# Altium PCB ICAN-7006-STM.PcbDoc (part 2 of 2)
Units mm, origin at the board's own origin, x right, y up, seen from the top; angles counter-clockwise.
Board outline 150 x 80 mm, 3 copper layers (Top Layer, DC3.3V, Bottom Layer); 45 components, 160 nets, 710 pads, 0 vias.
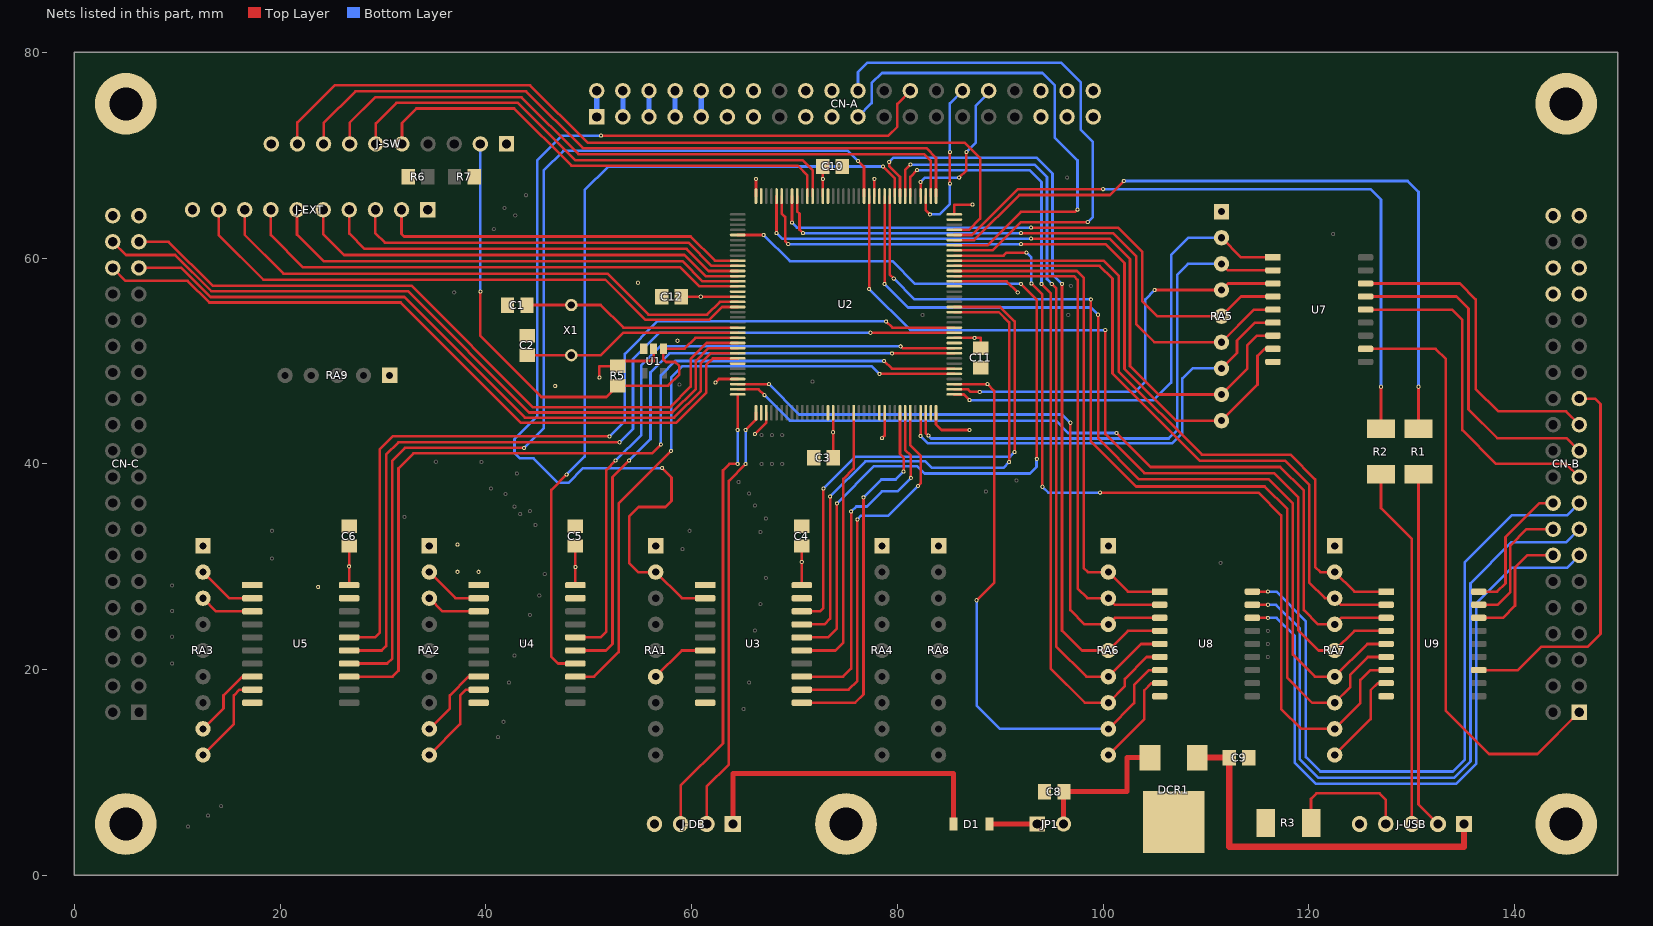
[diagram p3: the nets of this part, all layers, seen from the top]

## Nets (pads, with @x,y where several pads share a name; then routed paths per layer and width w, separated by ;. In a path a pad name is that pad's centre, name@x,y a point inside that pad or via, vN(x,y) a via of type N, cw(c..) or ccw(c..) an arc to the next point about the centre after c; other vN are vias at no path point) (continued)
DC3.3V: C3.2 C4.2 C5.2 C6.2 C10.2 C11.2 C12.2 CN-A.7 CN-A.8 D1.1 J-DB.1 J-EXT.1 J-SW.1 pad.0@26.7,30.048 pad.0@48.7,29.972 pad.0@51.029,48.387 pad.0@60.884,56.25 pad.0@62.3,47.9 pad.0@66.25,67.7 pad.0@66.142,42.901 pad.0@70.7,30.48 pad.0@72.75,67.7 pad.0@73.75,43.078 pad.0@77.75,67.7 pad.0@78.5,42.5 pad.0@87,43.3 pad.0@87.3,65.2 pad.0@87.5,52.25 pad.0@91.694,56.667 R5.2 RA1.1 RA2.1 RA3.1 RA4.1 RA5.1 RA6.1 RA7.1 RA8.1 RA9.1 U1.2 U2.17 U2.33 U2.39 U2.52 U2.62 U2.72 U2.84 U2.95 U2.108 U2.121 U2.131 U2.144 U3.20 U4.20 U5.20 | length 94.1
  Top Layer w0.254: U5.20@26.7,28.215 C6.2@26.7,32.025 ; U4.20@48.7,28.215 C5.2@48.7,32.025 ; pad.0@51.029,48.387 51.029,49.5 R5.2@52.8,49.5 53.3,50 56.3,50 U1.2@56.3,51.2 ; C12.2@59,56.25 U2.17@64.475,56.25 ; pad.0@62.3,47.9 62.65,48.25 U2.33@64.475,48.25 ; pad.0@66.142,42.901 67.25,44.009 U2.39@67.25,44.975 ; U2.144@66.25,66.025 pad.0@66.25,67.7 ; U3.20@70.7,28.215 C4.2@70.7,32.025 ; U2.131@72.75,66.025 C10.2@72.75,68.909 ; C3.2@73.75,40.6 U2.52@73.75,44.975 ; U2.121@77.75,66.025 pad.0@77.75,67.7 ; pad.0@78.5,42.5 78.75,42.75 U2.62@78.75,44.975 ; U2.72@83.75,44.975 83.75,43.85 84.3,43.3 pad.0@87,43.3 ; U2.84@85.525,52.25 88.1,52.25 C11.2@88.1,51.25 ; U2.95@85.525,57.75 90.611,57.75 pad.0@91.694,56.667 ; U2.108@85.525,64.25 85.525,65.2 pad.0@87.3,65.2
  Top Layer w0.5: J-DB.1@64,5 64,9.9 85.46,9.9 D1.1@85.46,5
  Bottom Layer w0.5: CN-A.7@58.39,73.73 CN-A.8@58.39,76.27
DC5V: CN-A.5 CN-A.6 | length 2.5
  Bottom Layer w0.5: CN-A.5@55.85,73.73 CN-A.6@55.85,76.27
DC12V: CN-A.3 CN-A.4 | length 2.5
  Bottom Layer w0.5: CN-A.3@53.31,73.73 CN-A.4@53.31,76.27
DC24V: CN-A.1 CN-A.2 | length 2.5
  Bottom Layer w0.5: CN-A.1@50.77,73.73 CN-A.2@50.77,76.27
EXT_0: J-EXT.2 U2.10 | length 36.1
  Top Layer w0.254: J-EXT.2@31.8,64.7 31.8,62.358 32.058,62.1 59.9,62.1 62.25,59.75 U2.10@64.475,59.75
EXT_1: J-EXT.3 U2.11 | length 38.8
  Top Layer w0.254: J-EXT.3@29.26,64.7 29.26,62.409 30.169,61.5 59.7,61.5 61.95,59.25 U2.11@64.475,59.25
EXT_2: J-EXT.4 U2.12 | length 41.6
  Top Layer w0.254: J-EXT.4@26.72,64.7 26.72,62.383 28.203,60.9 59.5,60.9 61.65,58.75 U2.12@64.475,58.75
EXT_3: J-EXT.5 U2.13 | length 44.4
  Top Layer w0.254: J-EXT.5@24.18,64.7 24.18,62.332 26.212,60.3 59.3,60.3 61.35,58.25 U2.13@64.475,58.25
EXT_4: J-EXT.6 U2.14 | length 47.1
  Top Layer w0.254: J-EXT.6@21.64,64.7 21.64,62.282 24.222,59.7 59.1,59.7 61.05,57.75 U2.14@64.475,57.75
EXT_5: J-EXT.7 U2.15 | length 49.9
  Top Layer w0.254: J-EXT.7@19.1,64.7 19.1,62.231 22.231,59.1 58.9,59.1 60.75,57.25 U2.15@64.475,57.25
EXT_6: J-EXT.8 U2.18 | length 54.1
  Top Layer w0.254: J-EXT.8@16.56,64.7 16.56,62.256 20.316,58.5 51.8,58.5 55.8,54.5 61.5,54.5 62.75,55.75 U2.18@64.475,55.75
EXT_7: J-EXT.9 U2.19 | length 56.8
  Top Layer w0.254: J-EXT.9@14.02,64.7 14.02,62.256 18.376,57.9 51.6,57.9 55.5,54 61.7,54 62.95,55.25 U2.19@64.475,55.25
GND: C1.2 C2.2 C3.1 C4.1 C5.1 C6.1 C8.1 C9.1 C10.1 C11.1 C12.1 CN-A.35 CN-A.36 CN-A.37 CN-A.38 CN-A.39 CN-A.40 CN-B.39 CN-B.40 CN-C.39 CN-C.40 DCR1.2 J-DB.4 J-EXT.10 J-SW.10 J-USB.5 pad.0@5,5 pad.0@5,75 pad.0@23.698,28.042 pad.0@37.236,29.515 pad.0@37.236,32.156 pad.0@39.294,29.515 pad.0@46.736,47.574 pad.0@54.771,57.608 pad.0@58.623,51.968 pad.0@75,5 pad.0@145,5 pad.0@145,75 R3.1 R6.2 R7.2 U1.3 U2.16 U2.30 U2.38 U2.51 U2.61 U2.71 U2.83 U2.94 U2.107 U2.120 U2.130 U2.143 U3.1 U3.10 U3.19 U4.1 U4.10 U4.19 U5.1 U5.10 U5.19 U7.9 U8.9 U9.9
I2C_SCL: CN-A.18
I2C_SCL2: CN-A.20
I2C_SDA: CN-A.17
I2C_SDA2: CN-A.19
JTCK: J-SW.8 U2.109 | length 69.2
  Top Layer w0.254: J-SW.8@24.22,71.1 24.22,73.12 27.308,76.208 43.892,76.208 49.416,70.684 82.816,70.684 83.75,69.75 U2.109@83.75,66.025
JTDI: J-SW.7 U2.110 | length 65.6
  Top Layer w0.254: J-SW.7@26.76,71.1 26.76,73.16 29.234,75.634 43.466,75.634 49,70.1 82.6,70.1 83.25,69.45 U2.110@83.25,66.025
JTDO: J-SW.6 U2.133 | length 50.5
  Top Layer w0.254: J-SW.6@29.3,71.1 29.3,73.1 31.3,75.1 43.1,75.1 48.7,69.5 70.8,69.5 71.75,68.55 U2.133@71.75,66.025
JTMS: J-SW.9 U2.105 | length 81.7
  Top Layer w0.254: J-SW.9@21.68,71.1 21.68,73.18 25.3,76.8 44.3,76.8 49.9,71.2 86.554,71.2 88.036,69.718 88.036,63.836 86.95,62.75 U2.105@85.525,62.75
JTRST: J-SW.5 U2.134 | length 46.7
  Top Layer w0.254: J-SW.5@31.84,71.1 31.84,73.14 33.246,74.546 42.754,74.546 48.31,68.99 70.31,68.99 71.25,68.05 U2.134@71.25,66.025
LIGHT-ON_CNT: pad.0@87.7,26.746 pad.0@88.75,47.75 RA6.8 U2.75 U8.7 | length 57.6
  Top Layer w0.254: U2.75@85.525,47.75 pad.0@88.75,47.75 89.4,47.1 89.4,28.446 pad.0@87.7,26.746 ; RA6.8@100.5,14.245 103,16.745 103,18.5 104.46,19.96 U8.7@105.5,19.96
  Bottom Layer w0.254: pad.0@87.7,26.746 87.7,16.516 89.971,14.245 RA6.8@100.5,14.245
LUG-BRAKE: CN-B.23 U7.16 | length 31.6
  Top Layer w0.254: U7.16@125.5,57.54 134.66,57.54 136.2,56 136.2,47.3 138.4,45.1 144.98,45.1 CN-B.23@146.27,43.81
LUG-BRAKE_CNT: pad.0@88,47 pad.0@105.005,56.905 RA5.4 U2.74 U7.3 | length 40.1
  Top Layer w0.254: U2.74@85.525,47.25 86.862,47.25 87.112,47 pad.0@88,47 ; pad.0@105.005,56.905 RA5.4@111.5,56.905 112.135,57.54 U7.3@116.5,57.54
  Bottom Layer w0.254: pad.0@88,47 103.1,47 104.1,48 104.1,56 pad.0@105.005,56.905
LUG-PWM1: CN-B.19 U7.14 | length 33.8
  Top Layer w0.254: U7.14@125.5,55 133.9,55 134.9,54 134.9,43.3 138.2,40 145,40 CN-B.19@146.27,38.73
LUG-PWM1_CNT: pad.0@70.819,62.431 pad.0@92,62.431 RA5.6 U2.136 U7.5 | length 59.1
  Top Layer w0.254: U2.136@70.25,66.025 70.25,64.552 70.485,64.317 70.485,62.765 pad.0@70.819,62.431 ; pad.0@92,62.431 100.969,62.431 103.2,60.2 103.2,53.6 104.975,51.825 RA5.6@111.5,51.825 114.675,55 U7.5@116.5,55
  Bottom Layer w0.254: pad.0@70.819,62.431 pad.0@92,62.431
LUG-PWM2: CN-B.21 U7.15 | length 32.7
  Top Layer w0.254: U7.15@125.5,56.27 134.33,56.27 135.5,55.1 135.5,45.3 138.3,42.5 145.04,42.5 CN-B.21@146.27,41.27
LUG-PWM2_CNT: pad.0@69.75,63.448 pad.0@93,62.964 RA5.5 U2.137 U7.4 | length 56.7
  Top Layer w0.254: pad.0@69.75,63.448 U2.137@69.75,66.025 ; pad.0@93,62.964 101.436,62.964 103.8,60.6 103.8,55.8 105.235,54.365 RA5.5@111.5,54.365 113.405,56.27 U7.4@116.5,56.27
  Bottom Layer w0.254: pad.0@69.75,63.448 70.234,62.964 pad.0@93,62.964
MF-DIR_CNT: pad.0@68.25,62.433 pad.0@93,61.897 RA5.8 U2.140 U7.7 | length 68.1
  Top Layer w0.254: pad.0@68.25,62.433 U2.140@68.25,66.025 ; pad.0@93,61.897 100.603,61.897 102.6,59.9 102.6,49.5 105.355,46.745 RA5.8@111.5,46.745 114,49.245 114,51.5 114.96,52.46 U7.7@116.5,52.46
  Bottom Layer w0.254: pad.0@68.25,62.433 68.786,61.897 pad.0@93,61.897
MF-ENB_CNT: pad.0@82.25,42.723 RA5.7 U2.69 U7.6 | length 45.5
  Top Layer w0.254: pad.0@82.25,42.723 U2.69@82.25,44.975 ; RA5.7@111.5,49.285 113,50.785 113,52 114.73,53.73 U7.6@116.5,53.73
  Bottom Layer w0.254: pad.0@82.25,42.723 82.973,42 106.7,42 107.7,43 107.7,48.3 108.685,49.285 RA5.7@111.5,49.285
MF-PWM: CN-B.1 U7.11 | length 58.8
  Top Layer w0.254: U7.11@125.5,51.19 132.31,51.19 133.3,50.2 133.3,16 137.5,11.8 142.2,11.8 CN-B.1@146.27,15.87
MF-PWM_CNT: pad.0@69.386,61.364 pad.0@92,61.364 RA5.9 U2.139 U7.8 | length 69.7
  Top Layer w0.254: U2.139@68.75,66.025 68.75,64.346 69.088,64.008 69.088,61.662 pad.0@69.386,61.364 ; pad.0@92,61.364 100.236,61.364 102.075,59.525 102.075,49.225 107.095,44.205 RA5.9@111.5,44.205 115,47.705 115,50.5 115.69,51.19 U7.8@116.5,51.19
  Bottom Layer w0.254: pad.0@69.386,61.364 pad.0@92,61.364
MIC-MOTOR: CN-B.25 U9.12 | length 37.9
  Top Layer w0.254: U9.12@136.5,19.96 140.305,19.96 142.57,22.225 147.091,22.225 148.336,23.47 148.336,45.822 147.808,46.35 CN-B.25@146.27,46.35
MIC-MOTOR_CNT: pad.0@92.532,60.528 pad.0@93.015,57.531 pad.0@94.079,37.779 pad.0@99.7,37.2 RA7.8 U2.100 U9.7 | length 88.4
  Top Layer w0.254: U2.100@85.525,60.25 90.324,60.25 90.602,60.528 pad.0@92.532,60.528 ; pad.0@93.015,57.531 94.079,56.467 pad.0@94.079,37.779 ; pad.0@99.7,37.2 115.1,37.2 117.3,35 117.3,16.2 119.255,14.245 RA7.8@122.5,14.245 125,16.745 125,19 125.96,19.96 U9.7@127.5,19.96
  Bottom Layer w0.254: pad.0@92.532,60.528 93.015,60.046 pad.0@93.015,57.531 ; pad.0@94.079,37.779 94.658,37.2 pad.0@99.7,37.2
ML-ALM: pad.0@43.713,41.554 pad.0@76.174,69.445 U2.123 U5.14 | length 100.1
  Top Layer w0.254: U5.14@26.7,20.595 30.395,20.595 30.9,21.1 30.9,40.323 32.131,41.554 pad.0@43.713,41.554 ; pad.0@76.174,69.445 76.75,68.868 U2.123@76.75,66.025
  Bottom Layer w0.254: pad.0@43.713,41.554 45.618,43.459 45.618,68.518 47.534,70.434 75.184,70.434 pad.0@76.174,69.445
ML-BRAKE_CNT: pad.0@78.75,57.5 pad.0@99.5,54.5 RA7.6 U2.119 U9.5 | length 90
  Top Layer w0.254: pad.0@78.75,57.5 U2.119@78.75,66.025 ; pad.0@99.5,54.5 99.5,42.5 103.5,38.5 116.1,38.5 118.425,36.175 118.425,21.475 120.575,19.325 RA7.6@122.5,19.325 125.675,22.5 U9.5@127.5,22.5
  Bottom Layer w0.254: pad.0@78.75,57.5 81.05,55.2 98.8,55.2 pad.0@99.5,54.5
ML-ENB_CNT: pad.0@77.25,57 pad.0@100.2,53 RA7.5 U2.122 U9.4 | length 88.1
  Top Layer w0.254: pad.0@77.25,57 U2.122@77.25,66.025 ; pad.0@100.2,53 100.2,42.9 104,39.1 116.6,39.1 118.975,36.725 118.975,23.825 120.935,21.865 RA7.5@122.5,21.865 124.405,23.77 U9.4@127.5,23.77
  Bottom Layer w0.254: pad.0@77.25,57 81.25,53 pad.0@100.2,53
ML-F/*R_CNT: pad.0@79.643,58 pad.0@98.8,56 RA7.7 U2.118 U9.6 | length 93.4
  Top Layer w0.254: U2.118@79.25,66.025 79.25,58.393 pad.0@79.643,58 ; pad.0@98.8,56 98.8,42.2 103.2,37.8 115.7,37.8 117.9,35.6 117.9,19.2 120.315,16.785 RA7.7@122.5,16.785 124,18.285 124,19.5 125.73,21.23 U9.6@127.5,21.23
  Bottom Layer w0.254: pad.0@79.643,58 81.643,56 pad.0@98.8,56
ML-PG: pad.0@57,41.885 pad.0@78.7,50 U2.78 U5.13 | length 87.3
  Top Layer w0.254: U5.13@26.7,19.325 30.925,19.325 31.5,19.9 31.5,39.577 32.941,41.018 56.134,41.018 pad.0@57,41.885 ; pad.0@78.7,50 79.45,49.25 U2.78@85.525,49.25
  Bottom Layer w0.254: pad.0@57,41.885 57,48.6 58.4,50 pad.0@78.7,50
ML-PWM: CN-B.14 U9.16 | length 11.9
  Top Layer w0.254: U9.16@136.5,25.04 138.84,25.04 140.028,26.228 140.028,29.928 141.21,31.11 CN-B.14@143.73,31.11
ML-PWM_CNT: pad.0@67.071,46.679 pad.0@101.3,43 RA7.4 U2.35 U9.3 | length 79.5
  Top Layer w0.254: U2.35@64.475,47.25 66.5,47.25 pad.0@67.071,46.679 ; pad.0@101.3,43 104.6,39.7 117.2,39.7 119.5,37.4 119.5,25.8 120.895,24.405 RA7.4@122.5,24.405 123.135,25.04 U9.3@127.5,25.04
  Bottom Layer w0.254: pad.0@67.071,46.679 69.55,44.2 95.4,44.2 96.6,43 pad.0@101.3,43
MLL-PG_B: pad.0@52,42.678 pad.0@78.902,53.848 U2.86 U5.16 | length 86.1
  Top Layer w0.254: U5.16@26.7,23.135 29.235,23.135 29.7,23.6 29.7,41.435 30.943,42.678 pad.0@52,42.678 ; pad.0@78.902,53.848 79.5,53.25 U2.86@85.525,53.25
  Bottom Layer w0.254: pad.0@52,42.678 53.5,44.178 53.5,50.7 56.648,53.848 pad.0@78.902,53.848
MLL-PG_F: pad.0@53,42.103 pad.0@77.368,52.75 U2.85 U5.15 | length 86.5
  Top Layer w0.254: U5.15@26.7,21.865 29.865,21.865 30.3,22.3 30.3,40.917 31.486,42.103 pad.0@53,42.103 ; pad.0@77.368,52.75 U2.85@85.525,52.75
  Bottom Layer w0.254: pad.0@53,42.103 54.3,43.403 54.3,50.2 56.85,52.75 pad.0@77.368,52.75
MLL-PWM1: CN-B.16 U9.17 | length 12.9
  Top Layer w0.254: U9.17@136.5,26.31 138.31,26.31 139.569,27.569 139.569,32.069 141.15,33.65 CN-B.16@143.73,33.65
MLL-PWM2: CN-B.18 U9.18 | length 13.4
  Top Layer w0.254: U9.18@136.5,27.58 138.28,27.58 139.1,28.4 139.1,32.9 142.39,36.19 CN-B.18@143.73,36.19
MLL-PWM2_CNT: RA7.2 U2.99 U9.1 | length 65.7
  Top Layer w0.254: U2.99@85.525,59.75 100.05,59.75 101.5,58.3 101.5,49 109.6,40.9 118.2,40.9 120.6,38.5 120.6,30 121.115,29.485 RA7.2@122.5,29.485 124.405,27.58 U9.1@127.5,27.58
MLL_PWM1_CNT: RA7.3 U2.98 U9.2 | length 66.6
  Top Layer w0.254: U2.98@85.525,59.25 99.65,59.25 100.9,58 100.9,48.8 109.4,40.3 117.7,40.3 120.009,37.991 120.009,28.491 121.555,26.945 RA7.3@122.5,26.945 123.135,26.31 U9.2@127.5,26.31
MLR-PG_B: pad.0@52.603,40.335 pad.0@80.318,51.432 U2.82 U4.16 | length 61.8
  Top Layer w0.254: U4.16@48.7,23.135 51.135,23.135 51.7,23.7 51.7,39.432 pad.0@52.603,40.335 ; pad.0@80.318,51.432 80.5,51.25 U2.82@85.525,51.25
  Bottom Layer w0.254: pad.0@52.603,40.335 55.1,42.832 55.1,49.6 56.932,51.432 pad.0@80.318,51.432
MLR-PG_F: pad.0@53.927,40.335 pad.0@79.477,50.75 U2.81 U4.15 | length 62.1
  Top Layer w0.254: U4.15@48.7,21.865 51.665,21.865 52.3,22.5 52.3,38.708 pad.0@53.927,40.335 ; pad.0@79.477,50.75 U2.81@85.525,50.75
  Bottom Layer w0.254: pad.0@53.927,40.335 56,42.408 56,48.9 57.85,50.75 pad.0@79.477,50.75
MLR-PWM1: CN-B.15 pad.0@116,26.31 U8.17 | length 66.3
  Top Layer w0.254: U8.17@114.5,26.31 pad.0@116,26.31
  Bottom Layer w0.254: pad.0@116,26.31 116.79,26.31 119.113,23.987 119.113,11.287 120.894,9.506 134.131,9.506 135.7,11.075 135.7,28.4 139.7,32.4 145.02,32.4 CN-B.15@146.27,33.65
MLR-PWM1_CNT: RA6.3 U2.96 U8.2 | length 50.8
  Top Layer w0.254: U2.96@85.525,58.25 97.15,58.25 97.512,57.887 97.512,27.888 98.455,26.945 RA6.3@100.5,26.945 101.135,26.31 U8.2@105.5,26.31
MLR-PWM2: CN-B.17 pad.0@116,27.58 U8.18 | length 68.8
  Top Layer w0.254: U8.18@114.5,27.58 pad.0@116,27.58
  Bottom Layer w0.254: pad.0@116,27.58 116.82,27.58 119.7,24.7 119.7,11.5 121.1,10.1 134,10.1 135.137,11.238 135.137,30.437 139.7,35 145.08,35 CN-B.17@146.27,36.19
MLR-PWM2_CNT: RA6.2 U2.97 U8.1 | length 49.4
  Top Layer w0.254: U2.97@85.525,58.75 97.45,58.75 98.1,58.1 98.1,29.9 98.515,29.485 RA6.2@100.5,29.485 102.405,27.58 U8.1@105.5,27.58
MOTOR-PWR1_CNT: pad.0@83.007,42.743 RA5.3 U2.70 U7.2 | length 52.1
  Top Layer w0.254: U2.70@82.75,44.975 82.75,43 pad.0@83.007,42.743 ; RA5.3@111.5,59.445 112.135,58.81 U7.2@116.5,58.81
  Bottom Layer w0.254: pad.0@83.007,42.743 83.284,42.466 106.366,42.466 107.2,43.3 107.2,58.4 108.245,59.445 RA5.3@111.5,59.445
MOTOR-PWR2_CNT: pad.0@87,46.2 RA5.2 U2.73 U7.1 | length 45.8
  Top Layer w0.254: U2.73@85.525,46.75 86.45,46.75 pad.0@87,46.2 ; RA5.2@111.5,61.985 113.405,60.08 U7.1@116.5,60.08
  Bottom Layer w0.254: pad.0@87,46.2 104.9,46.2 106.6,47.9 106.6,60.3 108.285,61.985 RA5.2@111.5,61.985
MR-ALM: pad.0@47.854,38.964 pad.0@78.591,68.909 U2.117 U4.14 | length 82.6
  Top Layer w0.254: pad.0@47.854,38.964 46.355,37.465 46.355,21.245 47.005,20.595 U4.14@48.7,20.595 ; pad.0@78.591,68.909 79.75,67.75 U2.117@79.75,66.025
  Bottom Layer w0.254: pad.0@47.854,38.964 49.6,40.71 49.6,66.6 51.909,68.909 pad.0@78.591,68.909
MR-BRAKE_CNT: pad.0@81.255,69.092 pad.0@95,57.5 RA6.6 U2.115 U8.5 | length 75.6
  Top Layer w0.254: U2.115@80.75,66.025 80.75,68.587 pad.0@81.255,69.092 ; pad.0@95,57.5 95.425,57.075 95.425,22.275 98.375,19.325 RA6.6@100.5,19.325 103.675,22.5 U8.5@105.5,22.5
  Bottom Layer w0.254: pad.0@81.255,69.092 93.308,69.092 94.536,67.864 94.536,57.964 pad.0@95,57.5
MR-ENB_CNT: pad.0@79.2,69.35 pad.0@96,57.5 RA6.5 U2.116 U8.4 | length 76.3
  Top Layer w0.254: pad.0@79.2,69.35 79.2,68.953 80.25,67.903 U2.116@80.25,66.025 ; pad.0@96,57.5 96,23.8 97.935,21.865 RA6.5@100.5,21.865 102.405,23.77 U8.4@105.5,23.77
  Bottom Layer w0.254: pad.0@79.2,69.35 79.621,69.771 93.529,69.771 95.07,68.23 95.07,58.43 pad.0@96,57.5
MR-F/*R_CNT: pad.0@81.902,68.552 pad.0@94,57.5 RA6.7 U2.114 U8.6 | length 77.3
  Top Layer w0.254: U2.114@81.25,66.025 81.25,67.9 pad.0@81.902,68.552 ; pad.0@94,57.5 94.9,56.6 94.9,20.1 98.215,16.785 RA6.7@100.5,16.785 102.107,18.393 102.107,19.107 104.23,21.23 U8.6@105.5,21.23
  Bottom Layer w0.254: pad.0@81.902,68.552 92.848,68.552 94,67.4 pad.0@94,57.5
MR-PG: pad.0@58,41.267 pad.0@78.25,48.75 U2.77 U4.13 | length 62.3
  Top Layer w0.254: U4.13@48.7,19.325 50.525,19.325 52.9,21.7 52.9,36.159 pad.0@58.008,41.267 ; pad.0@78.25,48.75 U2.77@85.525,48.75
  Bottom Layer w0.254: pad.0@58,41.267 58,48.4 59.1,49.5 77.5,49.5 pad.0@78.25,48.75
MR-PWM: CN-B.13 pad.0@116,25.04 U8.16 | length 64
  Top Layer w0.254: U8.16@114.5,25.04 pad.0@116,25.04
  Bottom Layer w0.254: pad.0@116,25.04 116.86,25.04 118.6,23.3 118.6,11 120.7,8.9 134.3,8.9 136.275,10.875 136.275,26.475 139.7,29.9 145.06,29.9 CN-B.13@146.27,31.11
MR-PWM_CNT: pad.0@67.5,47.75 pad.0@96.8,44 RA6.4 U2.34 U8.3 | length 61.6
  Top Layer w0.254: U2.34@64.475,47.75 pad.0@67.5,47.75 ; pad.0@96.8,44 96.8,25.8 98.195,24.405 RA6.4@100.5,24.405 101.135,25.04 U8.3@105.5,25.04
  Bottom Layer w0.254: pad.0@67.5,47.75 70.45,44.8 96,44.8 pad.0@96.8,44
NetC1_1: C1.1 U2.23 X1.2 | length 21.4
  Top Layer w0.254: C1.1@44,55.44 51.16,55.44 53.35,53.25 U2.23@64.475,53.25
NetC2_1: C2.1 U2.24 X1.1 | length 21.4
  Top Layer w0.254: C2.1@44,50.56 51.16,50.56 53.35,52.75 U2.24@64.475,52.75
NetC8_2: C8.2 DCR1.3 JP1.2 | length 14.8
  Top Layer w0.254: C8.2@96.14,8.104 C8.2@96.19,8.153
  Top Layer w0.5: JP1.2@96.14,5 C8.2@96.14,8.104 ; C8.2@96.19,8.153 102.328,8.153 102.328,11.45 DCR1.3@104.55,11.45
NetD1_2: D1.2 JP1.1 | length 4.7
  Top Layer w0.5: D1.2@88.94,5 JP1.1@93.6,5
NetJ-USB_2: J-USB.2 R1.2 | length 34.8
  Top Layer w0.254: R1.2@130.65,39 130.65,6.89 J-USB.2@132.54,5
NetJ-USB_3: J-USB.3 R2.2 | length 35.2
  Top Layer w0.254: R2.2@127,39 127,35.7 130,32.7 J-USB.3@130,5
NetJ-USB_4: J-USB.4 R3.2 | length 12.4
  Top Layer w0.254: R3.2@120.2,5.1 120.2,7.444 120.732,7.976 126.85,7.976 127.46,7.366 J-USB.4@127.46,5
NetRA1_6: RA1.6 U3.6 | length 5.9
  Top Layer w0.254: RA1.6@56.5,19.325 59.04,21.865 U3.6@61.3,21.865
NetRA2_2: RA2.2 U4.2 | length 5.9
  Top Layer w0.254: RA2.2@34.5,29.485 37.04,26.945 U4.2@39.3,26.945
NetRA2_3: RA2.3 U4.3 | length 5.3
  Top Layer w0.254: RA2.3@34.5,26.945 35.77,25.675 U4.3@39.3,25.675
NetRA2_8: RA2.8 U4.8 | length 7.6
  Top Layer w0.254: RA2.8@34.5,14.245 36.5,16.245 36.5,17.5 38.325,19.325 U4.8@39.3,19.325
NetRA2_9: RA2.9 U4.9 | length 9.1
  Top Layer w0.254: RA2.9@34.5,11.705 37.5,14.705 37.5,17.5 38.055,18.055 U4.9@39.3,18.055
NetRA3_2: RA3.2 U5.2 | length 5.9
  Top Layer w0.254: RA3.2@12.5,29.485 15.04,26.945 U5.2@17.3,26.945
NetRA3_3: RA3.3 U5.3 | length 5.3
  Top Layer w0.254: RA3.3@12.5,26.945 13.77,25.675 U5.3@17.3,25.675
NetRA3_8: RA3.8 U5.8 | length 7.6
  Top Layer w0.254: RA3.8@12.5,14.245 14.5,16.245 14.5,17.5 16.325,19.325 U5.8@17.3,19.325
NetRA3_9: RA3.9 U5.9 | length 9.1
  Top Layer w0.254: RA3.9@12.5,11.705 15.5,14.705 15.5,17.5 16.055,18.055 U5.9@17.3,18.055
NetRA6_9: RA6.9 U8.8 | length 9.5
  Top Layer w0.254: RA6.9@100.5,11.705 104,15.205 104,18 104.69,18.69 U8.8@105.5,18.69
NetRA7_9: RA7.9 U9.8 | length 9.5
  Top Layer w0.254: RA7.9@122.5,11.705 126,15.205 126,18 126.69,18.69 U9.8@127.5,18.69
PCM-CK: CN-B.35
PCM-DI: CN-B.34
PCM-DO: CN-B.33
PCM-SYNC: CN-B.36
RESET: J-SW.2 pad.0@39.46,56.74 R5.1 U1.1 U2.25 | length 52.7
  Top Layer w0.254: pad.0@39.46,56.74 39.46,52.44 45.392,46.508 51.708,46.508 R5.1@52.8,47.6 57.7,47.6 58.8,48.7 58.8,49.5 58.4,49.9 57.5,49.9 57.25,50.15 U1.1@57.25,51.2 59.3,51.2 60.35,52.25 U2.25@64.475,52.25
  Bottom Layer w0.254: pad.0@39.46,56.74 J-SW.2@39.46,71.1
SNS-BRAKE_CURR: CN-C.36 U2.29 | length 71.1
  Top Layer w0.254: CN-C.36@3.73,59.05 4.98,57.8 11.003,57.8 13.12,55.683 31.717,55.683 43.4,44 58.5,44 61.4,46.9 61.4,49.6 62.05,50.25 U2.29@64.475,50.25
SNS-COVER: pad.0@67,62.25 pad.0@74.117,36.17 pad.0@92,57.5 pad.0@93.546,40.484 U2.5 U3.16 | length 85.3
  Top Layer w0.254: U2.5@64.475,62.25 pad.0@67,62.25 ; U3.16@70.7,23.135 73.235,23.135 74.117,24.017 pad.0@74.117,36.17 ; pad.0@92,57.5 93.546,55.954 pad.0@93.546,40.484
  Bottom Layer w0.254: pad.0@67,62.25 69.55,59.7 79.5,59.7 81.7,57.5 pad.0@92,57.5 ; pad.0@74.117,36.17 77.73,39.782 81.918,39.782 82.635,39.065 92.862,39.065 93.515,39.718 pad.0@93.515,40.515
SNS-HOME_C: pad.0@75.5,35.368 pad.0@81.3,38.65 U2.66 U3.13 | length 34.1
  Top Layer w0.254: U3.13@70.7,19.325 74.725,19.325 75.5,20.1 pad.0@75.5,35.368 ; U2.66@80.75,44.975 80.75,41.348 81.3,40.798 pad.0@81.3,38.65
  Bottom Layer w0.254: pad.0@75.5,35.368 75.997,35.865 77.023,35.865 78.496,37.337 79.988,37.337 pad.0@81.3,38.65
SNS-HOME_L: pad.0@76.7,36.754 pad.0@80.6,39.25 U2.65 U3.11 | length 36.3
  Top Layer w0.254: U3.11@70.7,16.785 75.885,16.785 76.7,17.6 pad.0@76.7,36.754 ; U2.65@80.25,44.975 80.25,40.959 80.6,40.609 pad.0@80.6,39.25
  Bottom Layer w0.254: pad.0@76.7,36.754 78.427,38.481 79.831,38.481 pad.0@80.6,39.25
SNS-HOME_R: pad.0@76.1,34.596 pad.0@82,37.85 U2.67 U3.12 | length 36.4
  Top Layer w0.254: U3.12@70.7,18.055 75.255,18.055 76.1,18.9 pad.0@76.1,34.596 ; U2.67@81.25,44.975 81.25,41.813 82.271,40.792 82.271,38.121 pad.0@82,37.85
  Bottom Layer w0.254: pad.0@76.1,34.596 76.473,34.97 79.119,34.97 pad.0@82,37.85
SNS-LUG-CURR: CN-C.37 U2.26 | length 69
  Top Layer w0.254: CN-C.37@6.27,61.59 9.169,61.59 13.434,57.325 32.775,57.325 44.6,45.5 57.9,45.5 59.9,47.5 59.9,50.2 61.45,51.75 U2.26@64.475,51.75
SNS-MIC_CLOSE: U2.56 U3.15 | length 27.1
  Top Layer w0.254: U3.15@70.7,21.865 73.96,21.865 74.75,22.654 74.75,38.555 75.75,39.555 U2.56@75.75,44.975
SNS-MLL_CURR: CN-C.38 U2.27 | length 71.8
  Top Layer w0.254: CN-C.38@3.73,61.59 5.02,60.3 9.799,60.3 13.304,56.795 32.405,56.795 44.2,45 58.1,45 60.4,47.3 60.4,50 61.65,51.25 U2.27@64.475,51.25
SNS-MLR_CURR: CN-C.35 U2.28 | length 68.4
  Top Layer w0.254: CN-C.35@6.27,59.05 10.406,59.05 13.23,56.226 32.074,56.226 43.8,44.5 58.3,44.5 60.9,47.1 60.9,49.8 61.85,50.75 U2.28@64.475,50.75
SNS-RAIN: pad.0@73.457,36.83 pad.0@90.853,40.183 U2.89 U3.17 | length 53.5
  Top Layer w0.254: U3.17@70.7,24.405 72.905,24.405 73.457,24.957 pad.0@73.457,36.83 ; U2.89@85.525,54.75 89.847,54.75 90.853,53.744 pad.0@90.853,40.183
  Bottom Layer w0.254: pad.0@73.457,36.83 76.878,40.252 82.716,40.252 83.343,39.624 90.294,39.624 pad.0@90.853,40.183
SNS-US_EMG: pad.0@72.8,37.596 pad.0@91.387,41.145 U2.90 U3.18 | length 53
  Top Layer w0.254: U3.18@70.7,25.675 72.475,25.675 72.8,26 pad.0@72.8,37.596 ; U2.90@85.525,55.25 89.99,55.25 91.387,53.853 pad.0@91.387,41.145
  Bottom Layer w0.254: pad.0@72.8,37.596 75.918,40.714 90.955,40.714 pad.0@91.387,41.145
U5V: C9.2 DCR1.1 J-USB.1 | length 36.8
  Top Layer w0.6: DCR1.1@109.15,11.45 C9.2@112.25,11.45 112.25,2.794 135.08,2.794 J-USB.1@135.08,5
UART-CB_RX: CN-A.22 pad.0@98.5,63.5 U2.101 | length 53
  Top Layer w0.254: U2.101@85.525,60.75 89.25,60.75 92,63.5 pad.0@98.5,63.5
  Bottom Layer w0.254: CN-A.22@76.17,76.27 76.17,78.07 77.1,79 95.9,79 97.8,77.1 97.8,72.5 99,71.3 99,64 pad.0@98.5,63.5
UART-CB_TX: CN-A.21 pad.0@97.5,64.709 U2.102 | length 48.9
  Top Layer w0.254: U2.102@85.525,61.25 88.75,61.25 92,64.5 97.282,64.5 ; 97.282,64.491 pad.0@97.5,64.709
  Bottom Layer w0.254: CN-A.21@76.17,73.73 77.5,75.06 77.5,77 78.5,78 94.1,78 95.3,76.8 95.3,71.7 97.5,69.5 pad.0@97.5,64.709
UART-DB_RX: J-DB.3 pad.0@64.475,40 pad.0@64.475,43.3 U2.36 | length 44.5
  Top Layer w0.254: J-DB.3@58.92,5 58.92,8.72 63.043,12.843 63.043,39.37 63.673,40 pad.0@64.475,40 ; pad.0@64.475,43.3 U2.36@64.475,46.75
  Bottom Layer w0.254: pad.0@64.475,40 pad.0@64.475,43.3
UART-DB_TX: J-DB.2 pad.0@65.25,40 pad.0@65.25,43.3 U2.37 | length 42
  Top Layer w0.254: J-DB.2@61.46,5 61.46,8.66 63.607,10.807 63.607,38.357 pad.0@65.25,40 ; pad.0@65.25,43.3 66.25,44.3 U2.37@66.25,44.975
  Bottom Layer w0.254: pad.0@65.25,40 pad.0@65.25,43.3
US_EMG: CN-A.26 pad.0@51.181,71.907 pad.0@57.127,39.596 RA1.2 U3.2 | length 107.5
  Top Layer w0.254: pad.0@51.181,71.907 79.121,71.907 79.985,72.771 79.985,75.005 CN-A.26@81.25,76.27 ; pad.0@57.127,39.596 58.039,38.684 58.039,36.398 57.455,35.814 54.839,35.814 53.924,34.9 53.924,30.353 54.792,29.485 RA1.2@56.5,29.485 59.04,26.945 U3.2@61.3,26.945
  Bottom Layer w0.254: pad.0@51.181,71.907 47.396,71.907 44.983,69.494 44.983,44.618 42.774,42.408 42.774,41.072 43.31,40.536 44.63,40.536 47.015,38.151 48.006,38.151 49.451,39.596 pad.0@57.127,39.596
US_POWER: CN-A.32 pad.0@82.25,67.4 pad.0@86.004,67.818 pad.0@86.7,70.3 U2.112 | length 14.7
  Top Layer w0.254: U2.112@82.25,66.025 pad.0@82.25,67.4 ; pad.0@86.004,67.818 86.7,68.514 pad.0@86.7,70.3
  Bottom Layer w0.254: pad.0@82.25,67.4 82.668,67.818 pad.0@86.004,67.818 ; pad.0@86.7,70.3 87.6,71.2 87.6,74.8 CN-A.32@88.87,76.07
USB-DM: pad.0@102,67.5 pad.0@130.65,47.5 R1.1 U2.103 | length 71
  Top Layer w0.254: U2.103@85.525,61.75 87.45,61.75 91.842,66.142 100.642,66.142 pad.0@102,67.5 ; R1.1@130.65,43.4 pad.0@130.65,47.5
  Bottom Layer w0.254: pad.0@102,67.5 129.6,67.5 130.65,66.45 pad.0@130.65,47.5
USB-DP: pad.0@100,66.7 pad.0@127,47.5 R2.1 U2.104 | length 66
  Top Layer w0.254: U2.104@85.525,62.25 87.25,62.25 91.7,66.7 pad.0@100,66.7 ; R2.1@127,43.4 pad.0@127,47.5
  Bottom Layer w0.254: pad.0@100,66.7 126,66.7 127,65.7 pad.0@127,47.5
USB_5V: CN-A.9 CN-A.10 | length 2.5
  Bottom Layer w0.5: CN-A.9@60.93,73.73 CN-A.10@60.93,76.27
USB_DM1: CN-A.11
USB_DM2: CN-A.12
USB_DP1: CN-A.13
USB_DP2: CN-A.14
USB_POWER: CN-A.30 pad.0@83.16,64.262 pad.0@85.1,67.234 pad.0@85.1,70.3 U2.111 | length 15.8
  Top Layer w0.254: U2.111@82.75,66.025 82.75,64.672 pad.0@83.16,64.262 ; pad.0@85.1,67.234 pad.0@85.1,70.3
  Bottom Layer w0.254: pad.0@83.16,64.262 84.111,64.262 85.1,65.251 pad.0@85.1,67.234 ; pad.0@85.1,70.3 85.1,75.04 CN-A.30@86.33,76.27
pads on no net: CN-A.15 CN-A.16 CN-A.23 CN-A.24 CN-A.27 CN-A.28 CN-A.34 CN-B.2 CN-B.4 CN-B.6 CN-B.20 CN-B.22 CN-B.24 CN-B.26 CN-B.27 CN-B.28 CN-B.29 CN-B.30 CN-B.31 CN-B.32 CN-B.37 CN-B.38 RA8.8 RA8.9 U1.4 U1.5 U2.6 U2.7 U2.8 U2.9 U2.20 U2.21 U2.22 U2.31 U2.32 U2.41 U2.45 U2.49 U2.50 U2.53 U2.54 U2.55 U2.68 U2.76 U2.79 U2.80 U2.106 U2.113 U2.124 U2.125 U2.126 U2.127 U2.128 U2.129 U2.132 U2.135 U2.141 U2.142 U3.14 U4.11 U4.12 U4.17 U4.18 U5.11 U5.12 U5.17 U5.18 U7.10 U8.10 U8.11 U9.10 U9.11

## Polygon pours and split planes (outlines as drawn)
GND on Top Layer "Top Layer-No Net" (solid, pour order 1002): 0.127,0.127 149.873,0.127 149.873,79.873 0.127,79.873
DC3.3V on DC3.3V "DC3.3V-No Net" (solid, pour order 1001): 0.127,0.127 149.873,0.127 149.873,79.873 0.127,79.873
GND on Bottom Layer "Bottom Layer-No Net" (solid, pour order 1000): 0.127,0.127 149.873,0.127 149.873,79.873 0.127,79.873

## Silkscreen, mask and mechanical layers (free items; w line width, h text height)
Top Overlay:
  lines w0.254: 11.5,66.396 11.5,69.7 ; 15.2,71.2 17.5,71.2 ; 35.966,64.592 38.466,64.592 ; 41.986,65.634 42,69.4
  text "ICAN7006-B1" at 11.963,75.514 h3
  text "STM SUB" at 113.3,75 h3
  text "GND" at 11.1,70.3 h2
  text "3.3V" at 38.151,64.592 h2
  text "OUT" at 59.6,9.7 h1.52 r90
  text "IN" at 62.3,9.7 h1.52 r90
  text "3.3V" at 66.5,9.6 h1.52 r90
  text "2018-03-25" at 15.418,4.293 h2.5
  text "USB 5V" at 89.3,1.4 h2
  text "REV. 00" at 15.519,0.635 h2.5
Mechanical 13:
  the board outline again, w0.254

## Text inside footprints (layer, text, board x,y; h text height)
CN-A: Top Overlay "1" at 48.23,73.222 h1.27; Top Overlay "2" at 48.23,75.762 h1.27; Top Overlay "40" at 101.062,75.762 h1.27; Top Overlay "39" at 101.062,73.222 h1.27
CN-B: Top Overlay "1" at 146.778,13.33 h1.27 r90; Top Overlay "2" at 144.238,13.33 h1.27 r90; Top Overlay "40" at 144.238,66.162 h1.27 r90; Top Overlay "39" at 146.778,66.162 h1.27 r90
CN-C: Top Overlay "1" at 6.778,13.33 h1.27 r90; Top Overlay "2" at 4.238,13.33 h1.27 r90; Top Overlay "40" at 4.238,66.162 h1.27 r90; Top Overlay "39" at 6.778,66.162 h1.27 r90